# Altium PCB TMS320F28335GF.PcbDoc
Units mil, origin at the board's own origin, x right, y up, seen from the top; angles counter-clockwise.
Board outline 6000 x 4000 mil, 2 copper layers (Top Layer, Bottom Layer); 146 components, 454 nets, 1311 pads, 0 vias.
Unrouted connection lines stored in the file: 803.
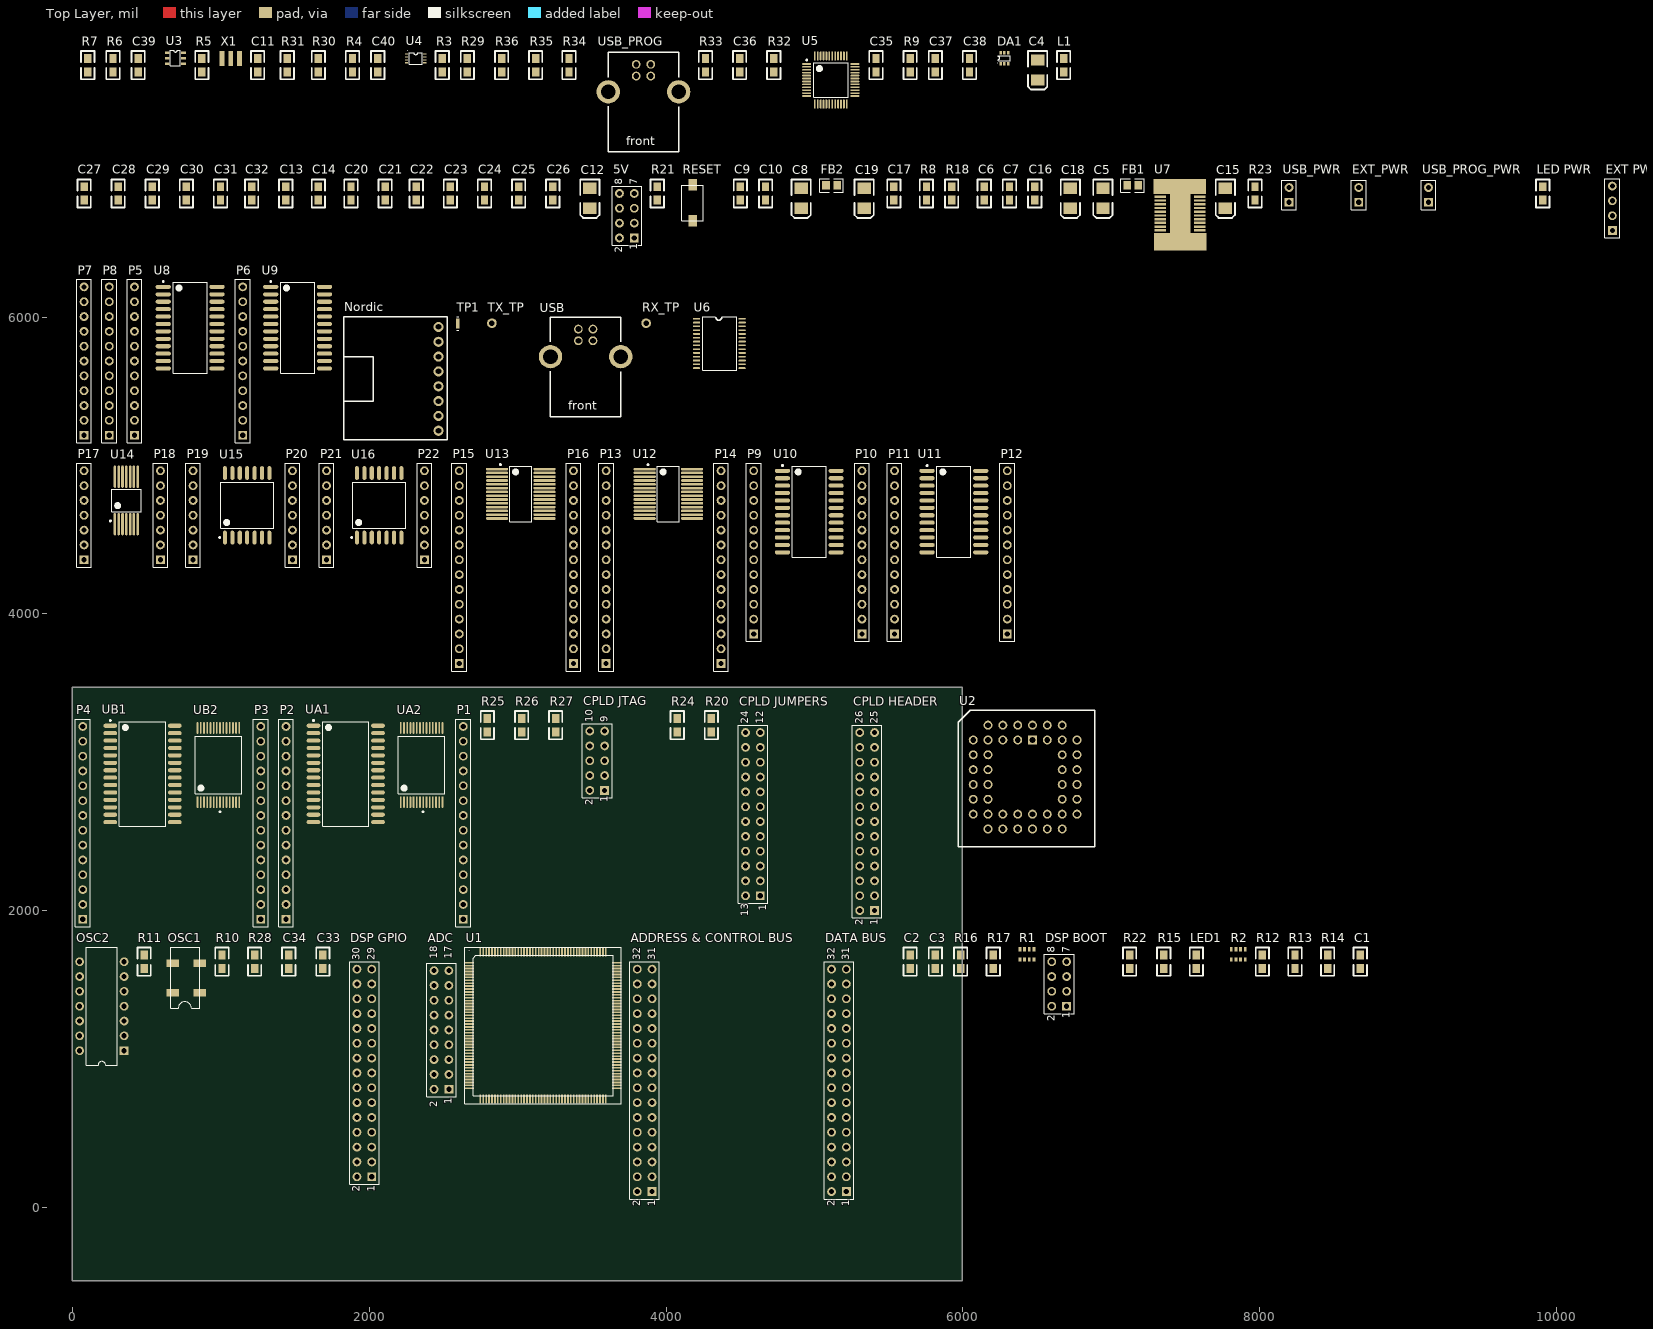
[diagram p0: Top Layer view]
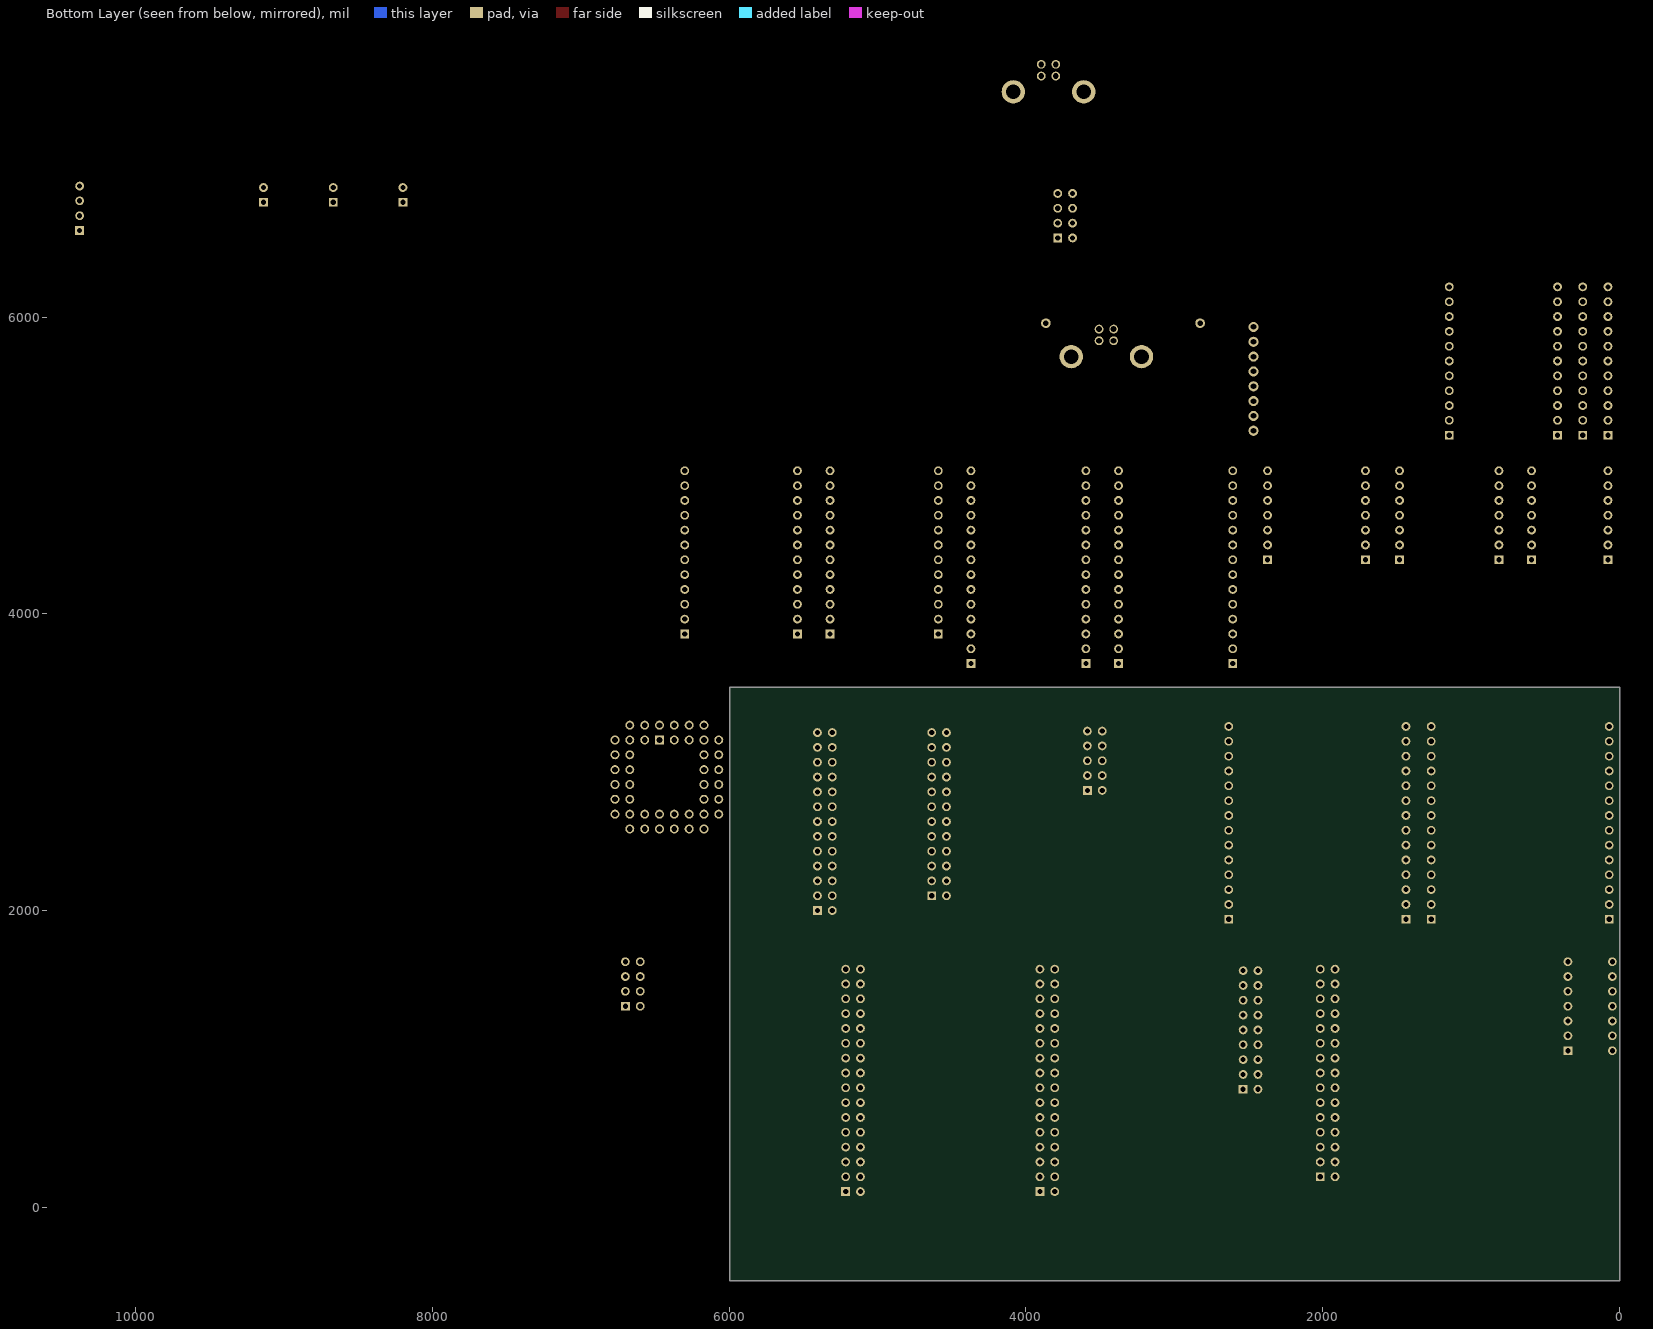
[diagram p1: Bottom Layer view, seen from below]

## Layer stack, top to bottom
Top Solder: solder mask 0.4, Solder Resist, Dk 3.5
Top Layer: signal copper 1.4
Dielectric 1: dielectric 12.6, FR-4, Dk 4.8
Bottom Layer: signal copper 1.4
Bottom Solder: solder mask 0.4, Solder Resist, Dk 3.5

## Board outline
-5,-495 5995,-495 5995,3505 -5,3505

## Design rules (kind name [scope] priority, off if disabled: settings)
Clearance [All] p1: gap=10
PolygonConnect [All] p1: connectstyle=Relief reliefconductorwidth=10 reliefentries=4 polygonreliefangle="90 Angle" airgapwidth=10
RoomDefinition XDS_100_USB_Programmer [InComponentClass('XDS_100_USB_Programmer')] p1: confinementstyle=ConfineIn formatcopy=TRUE lockcomponents=FALSE outline 40,7100 6740,7100 6740,7910 40,7910
RoomDefinition Power [InComponentClass('Power')] p2: confinementstyle=ConfineIn formatcopy=TRUE lockcomponents=FALSE outline 15,6420 10755,6420 10755,7045 15,7045
RoomDefinition F28335_USB_and_Nordic [InComponentClass('F28335_USB_and_Nordic')] p3: confinementstyle=ConfineIn formatcopy=TRUE lockcomponents=FALSE outline 1810,5165 4550,5165 4550,6115 1810,6115
RoomDefinition F28335_Level_Shifters [InComponentClass('F28335_Level_Shifters')] p4: confinementstyle=ConfineIn formatcopy=TRUE lockcomponents=FALSE outline 15,5145 1775,5145 1775,6365 15,6365
RoomDefinition F28335_FanOut [InComponentClass('F28335_FanOut')] p5: confinementstyle=ConfineIn formatcopy=TRUE lockcomponents=FALSE outline 15,3605 6425,3605 6425,5125 15,5125
RoomDefinition F28335_CPLD [InComponentClass('F28335_CPLD')] p6: confinementstyle=ConfineIn formatcopy=TRUE lockcomponents=FALSE outline 2735,1885 6900,1885 6900,3460 2735,3460
RoomDefinition F28335_AddOn_Memory [InComponentClass('F28335_AddOn_Memory')] p7: confinementstyle=ConfineIn formatcopy=TRUE lockcomponents=FALSE outline 7.01,1881.1 2692.01,1881.1 2692.01,3401.1 7.01,3401.1
RoomDefinition C283x_DSP [InComponentClass('C283x_DSP')] p8: confinementstyle=ConfineIn formatcopy=TRUE lockcomponents=FALSE outline 5,-10 8740,-10 8740,1865 5,1865
RoutingVias [All] p1: holewidth=28 width=50 viastyle="Through Hole" minholewidth=28 minwidth=50 maxholewidth=28 maxwidth=50
SolderMaskExpansion [All] p1: expansion=4
Width "Schematic Width Constraint_2" [InNet('5V_USB_PWR')] p1: maxlimit=20 minlimit=10 preferedwidth=20
Width "Schematic Width Constraint_1" [InNet('EXT_PWR')] p2: maxlimit=15 minlimit=15 preferedwidth=15
Width "Schematic Width Constraint" [InNet('+5.0V')] p3: maxlimit=15 minlimit=11 preferedwidth=11
Width [All] p4: maxlimit=10 minlimit=10 preferedwidth=10
30 further rules are at their usual default settings.

## Classes and differential pairs
net class XD[0..15]: XD0 XD1 XD2 XD3 XD4 XD5 XD6 XD7 XD8 XD9 XD10 XD11 XD12 XD13 XD14 XD15
net class XA[0..19]: XA0 XA1 XA2 XA3 XA4 XA5 XA6 XA7 XA8 XA9 XA10 XA11 XA12 XA13 XA14 XA15 XA16 XA17 XA18 XA19
component class XDS_100_USB_Programmer: C4 C11 C35 C36 C37 C38 C39 C40 DA1 L1 R3 R4 R5 R6 R7 R9 R29 R30 R31 R32 R33 R34 R35 R36 U3 U4 U5 USB_PROG X1 "XDS-100 JTAG"
component class Power: 5V C5 C6 C7 C8 C9 C10 C12 C13 C14 C15 C16 C17 C18 C19 C20 C21 C22 C23 C24 C25 C26 C27 C28 C29 C30 C31 C32 "EXT PWR" EXT_PWR FB1 FB2 "LED PWR" R8 R18 R21 R23 RESET U7 USB_PROG_PWR USB_PWR
component class F28335_USB_and_Nordic: Nordic RX_TP TP1 TX_TP U6 USB
component class F28335_Level_Shifters: P5 P6 P7 P8 U8 U9
component class F28335_FanOut: P9 P10 P11 P12 P13 P14 P15 P16 P17 P18 P19 P20 P21 P22 U10 U11 U12 U13 U14 U15 U16
component class F28335_CPLD: "CPLD HEADER" "CPLD JTAG" "CPLD JUMPERS" R20 R24 R25 R26 R27 U2
component class F28335_AddOn_Memory: P1 P2 P3 P4 UA1 UA2 UB1 UB2
component class C283x_DSP: ADC "ADDRESS & CONTROL BUS" C1 C2 C3 C33 C34 "DATA BUS" "DSP BOOT" "DSP GPIO" LED1 OSC1 OSC2 R1 R2 R10 R11 R12 R13 R14 R15 R16 R17 R22 R28 U1

## Components (designator, comment, footprint, x,y, rotation, side; value= is the part's Value field where it differs from the comment)
5V "Header 4X2" HDR2X4 3785,6535 r90 top
ADC "Header 9X2" HDR2X9 2535,795 r90 top
"ADDRESS & CONTROL BUS" "Header 16X2" HDR2X16 3905,105 r90 top
C1 "Cap Semi" 0805 8680,1610 r90 top
C2 "Cap Semi" 0805 5645,1610 r90 top
C3 "Cap Semi" 0805 5815,1610 r90 top
C4 "Pol Cap" 3528 6505,7600 r90 top
C5 "10uF" 3528 6945,6735 r90 top
C6 "Cap Semi" 0805 6145,6790 r90 top
C7 "Cap Semi" 0805 6315,6790 r90 top
C8 "10uF" 3528 4910,6735 r90 top
C9 "Cap Semi" 0805 4500,6790 r90 top
C10 "Cap Semi" 0805 4670,6790 r90 top
C11 "Cap Semi" 0805 1245,7655 r90 top
C12 "10uF" 3528 3485,6735 r90 top
C13 "Cap Semi" 0805 1435,6790 r90 top
C14 "Cap Semi" 0805 1655,6790 r90 top
C15 "10uF" 3528 7770,6735 r90 top
C16 "Cap Semi" 0805 6485,6790 r90 top
C17 "Cap Semi" 0805 5535,6790 r90 top
C18 "10uF" 3528 6725,6735 r90 top
C19 "10uF" 3528 5335,6735 r90 top
C20 "Cap Semi" 0805 1875,6790 r90 top
C21 "Cap Semi" 0805 2105,6790 r90 top
C22 "Cap Semi" 0805 2315,6790 r90 top
C23 "Cap Semi" 0805 2545,6790 r90 top
C24 "Cap Semi" 0805 2775,6790 r90 top
C25 "Cap Semi" 0805 3005,6790 r90 top
C26 "Cap Semi" 0805 3235,6790 r90 top
C27 "Cap Semi" 0805 75,6790 r90 top
C28 "Cap Semi" 0805 305,6790 r90 top
C29 "Cap Semi" 0805 535,6790 r90 top
C30 "Cap Semi" 0805 765,6790 r90 top
C31 "Cap Semi" 0805 995,6790 r90 top
C32 "Cap Semi" 0805 1205,6790 r90 top
C33 "Cap Semi" 0805 1685,1610 r90 top
C34 "Cap Semi" 0805 1455,1610 r90 top
C35 "Cap Semi" 0805 5415,7655 r90 top
C36 "Cap Semi" 0805 4495,7655 r90 top
C37 "Cap Semi" 0805 5815,7655 r90 top
C38 "Cap Semi" 0805 6045,7655 r90 top
C39 "Cap Semi" 0805 440,7655 r90 top
C40 "Cap Semi" 0805 2055,7655 r90 top
"CPLD HEADER" "Header 13X2" HDR2X13 5405,2000 r90 top
"CPLD JTAG" "JTAG" HDR2X5 3585,2810 r90 top
"CPLD JUMPERS" "Header 12X2A" HDR2X12_CEN 4635,2100 r90 top
DA1 "BAW567DW-7" BAW567DW 6255,7710 r0 top
"DATA BUS" "Header 16X2" HDR2X16 5215,105 r90 top
"DSP BOOT" "Header 4X2" HDR2X4 6700,1355 r90 top
"DSP GPIO" "Header 15X2" HDR2X15 2015,205 r90 top
"EXT PWR" "Header 4" HDR1X4 10380,6585 r90 top
EXT_PWR "Header 2" HDR1X2 8670,6775 r90 top
FB1 "Ferrite_Bead" CR2012-0805 7145,6890 r0 top
FB2 "Ferrite_Bead" CR2012-0805 5115,6890 r0 top
L1 "Inductor" 0805 6680,7655 r90 top
LED1 "LED3" 0805 7575,1610 r90 top
"LED PWR" "LED3" 0805 9910,6790 r90 top
Nordic "Nordic MiRF v2" "Nordic MiRF v2" 2465,5235 r90 top
OSC1 "Epson Oscillator" Oscillator 855,1445 r90 top
OSC2 "CLOCK_DIP" DIP-14 195,1355 r90 top
P1 "Header 14" HDR1X14 2632.01,1941.1 r90 top
P2 "Header 14" HDR1X14 1437.01,1941.1 r90 top
P3 "Header 14" HDR1X14 1267.01,1941.1 r90 top
P4 "Header 14" HDR1X14 67.01,1941.1 r90 top
P5 "Header 11" HDR1X11 415,5205 r90 top
P6 "Header 11" HDR1X11 1145,5205 r90 top
P7 "Header 11" HDR1X11 75,5205 r90 top
P8 "Header 11" HDR1X11 245,5205 r90 top
P9 "Header 12" HDR1X12 4590,3865 r90 top
P10 "Header 12" HDR1X12 5320,3865 r90 top
P11 "Header 12" HDR1X12 5540,3865 r90 top
P12 "Header 12" HDR1X12 6300,3865 r90 top
P13 "Header 14" HDR1X14 3595,3665 r90 top
P14 "Header 14" HDR1X14 4370,3665 r90 top
P15 "Header 14" HDR1X14 2605,3665 r90 top
P16 "Header 14" HDR1X14 3375,3665 r90 top
P17 "Header 7" HDR1X7 75,4365 r90 top
P18 "Header 7" HDR1X7 590,4365 r90 top
P19 "Header 7" HDR1X7 810,4365 r90 top
P20 "Header 7" HDR1X7 1480,4365 r90 top
P21 "Header 7" HDR1X7 1710,4365 r90 top
P22 "Header 7" HDR1X7 2370,4365 r90 top
R1 "Res Pack 4" SO-8 6385,1670 r0 top
R2 "Res Pack 4" SO-8 7810,1670 r0 top
R3 "Res" 0805 2490,7655 r90 top
R4 "Res" 0805 1885,7655 r90 top
R5 "Res" 0805 870,7655 r90 top
R6 "Res" 0805 270,7655 r90 top
R7 "Res" 0805 100,7655 r90 top
R8 "Res" 0805 5755,6790 r90 top
R9 "Res" 0805 5645,7655 r90 top
R10 "Res" 0805 1005,1610 r90 top
R11 "Res" 0805 480,1610 r90 top
R12 "Res" 0805 8020,1610 r90 top
R13 "Res" 0805 8240,1610 r90 top
R14 "Res" 0805 8460,1610 r90 top
R15 "Res" 0805 7355,1610 r90 top
R16 "Res" 0805 5985,1610 r90 top
R17 "Res" 0805 6205,1610 r90 top
R18 "Res" 0805 5925,6790 r90 top
R20 "Res" 0805 4305,3205 r90 top
R21 "Res" 0805 3940,6790 r90 top
R22 "Res" 0805 7125,1610 r90 top
R23 "Res" 0805 7970,6790 r90 top
R24 "Res" 0805 4075,3205 r90 top
R25 "Res" 0805 2795,3205 r90 top
R26 "Res" 0805 3025,3205 r90 top
R27 "Res" 0805 3255,3205 r90 top
R28 "Res" 0805 1225,1610 r90 top
R29 "Res" 0805 2660,7655 r90 top
R30 "Res" 0805 1655,7655 r90 top
R31 "Res" 0805 1445,7655 r90 top
R32 "Res" 0805 4725,7655 r90 top
R33 "Res" 0805 4265,7655 r90 top
R34 "Res" 0805 3345,7655 r90 top
R35 "Res" 0805 3120,7655 r90 top
R36 "Res" 0805 2890,7655 r90 top
RESET "SW-PB" SWITCH_2PAD_SMD 4180,6650 r90 top
RX_TP "Testpoint" "TestPoint Trough-Hole" 3865,5960 r90 top
TP1 "Testpoint" TestPoint 2595,5960 r90 top
TX_TP "Testpoint" "TestPoint Trough-Hole" 2825,5960 r90 top
U1 "TMS320F28335GF" QFP176 3170,1225 r0 top
U2 "EPM3064ALC44" PLCC_44 6450,3070 r0 top
U3 "93LC46BT-I/OT" 93LC46BT-I/OT 635,7785 r0 top
U4 "SN74LVC2G74DCU" DCU8 2250,7775 r0 top
U5 "FTDI FT2232D" "FTDI FT2232D" 5110,7600 r0 top
U6 "FT232RL" SSOP28 4205,5990 r0 top
U7 "TPS70351" PWP24 7465,6695 r0 top
U8 "SN74CBTD3384" DW-24 790,5930 r0 top
U9 "SN74CBTD3384" DW-24 1515,5930 r0 top
U10 "SN74CBTD3384" DW-24 4965,4690 r0 top
U11 "SN74CBTD3384" DW-24 5940,4690 r0 top
U12 "SSOP 28 Fanout" "SSOP-28 Fan out" 4015,4810 r0 top
U13 "SSOP 28 Fanout" "SSOP-28 Fan out" 3020,4810 r0 top
U14 "SSOP 14 Fanout" "SSOP-14 Fan out" 360,4765 r90 top
U15 "SOIC 14 Fanout" "SOIC-14 Fan out" 1025,4515 r90 top
U16 "SOIC 14 Fanout" "SOIC-14 Fan out" 1915,4515 r90 top
UA1 "CY62256VNLL" "28-SOIC CY62256VNLL" 1622.01,3246.1 r0 top
UA2 "CY62256VNLL" "28-TSSOP CY62256VNLL" 2362.01,2731.1 r90 top
UB1 "CY62256VNLL" "28-SOIC CY62256VNLL" 252.01,3246.1 r0 top
UB2 "CY62256VNLL" "28-TSSOP CY62256VNLL" 992.01,2731.1 r90 top
USB "DSP UART" USB_TypeB_RightAngle 3220,5735 r0 top
USB_PROG "USB" USB_TypeB_RightAngle 3610,7520 r0 top
USB_PROG_PWR "Header 2" HDR1X2 9140,6775 r90 top
USB_PWR "Header 2" HDR1X2 8200,6775 r90 top
X1 "6MHz Resonator" "6.00Mhz Resonator" 1005,7745 r0 top

## Footprints (in the part's own frame and the unit in brackets; to place one, negate y for a bottom-side part, rotate by r counter-clockwise, add the part's x,y. Pads: shape width x height; smd on the part's side, far side on the other; paste and mask are expansions set on the pad)
"6.00Mhz Resonator" [mm]
  rect 0.8x2.6 smd: 1(0,0) 2(1.5,0) 3(3,0)
"28-SOIC CY62256VNLL" [mm]
  oval 2.35x0.7 smd: 1(0,0) 2(0,-1.27) 3(0,-2.54) 4(0,-3.81) 5(0,-5.08) 6(0,-6.35) 7(0,-7.62) 8(0,-8.89) 9(0,-10.16) 10(0,-11.43) 11(0,-12.7) 12(0,-13.97) 13(0,-15.24) 14(0,-16.51) 15(11.05,-16.51) 16(11.05,-15.24) 17(11.05,-13.97) 18(11.05,-12.7) 19(11.05,-11.43) 20(11.05,-10.16) 21(11.05,-8.89) 22(11.05,-7.62) 23(11.05,-6.35) 24(11.05,-5.08) 25(11.05,-3.81) 26(11.05,-2.54) 27(11.05,-1.27) 28(11.05,0)
  silkscreen extent -0.12,-17.2 9.48,1.02, body extent 1.77,-17.22 9.28,0.71, height 2.59
"28-TSSOP CY62256VNLL" [mm]
  oval 2x0.3 smd: 1(0,0) 2(0,-0.55) 3(0,-1.1) 4(0,-1.65) 5(0,-2.2) 6(0,-2.75) 7(0,-3.3) 8(12.7,-3.3) 9(12.7,-2.75) 10(12.7,-2.2) 11(12.7,-1.65) 12(12.7,-1.1) 13(12.7,-0.55) 14(12.7,0) 15(12.7,0.55) 16(12.7,1.1) 17(12.7,1.65) 18(12.7,2.2) 19(12.7,2.75) 20(12.7,3.3) 21(12.7,3.85) 22(0,3.85) 23(0,3.3) 24(0,2.75) 25(0,2.2) 26(0,1.65) 27(0,1.1) 28(0,0.55)
  silkscreen extent -1.77,-3.73 11.3,4.28, body extent 0.45,-3.72 12.25,4.28, height 1.1
93LC46BT-I/OT [mm]
  rect 0.8x0.43 smd: 1(0,0) 2(0,-0.95) 3(0,-1.9) 4(2.8,-1.9) 5(2.8,-0.95) 6(2.8,0)
  silkscreen extent 0.56,-2.29 2.24,0.41
0805 [mil]
  rect 60x50 smd: 1(0,0) 2(90,0)
  silkscreen extent -50,-45 140,45
3528 [mil]
  rect 75x90 smd: 1(0,0) 2(135,0)
  silkscreen extent -65,-65 195,65
BAW567DW [mm]
  rect 0.42x0.6 smd: 1(0,0) 2(0.65,0) 3(1.3,0) 4(1.3,1.9) 5(0.65,1.9) 6(0,1.9)
  silkscreen extent -0.41,0.51 1.68,1.37
CR2012-0805 [mm]
  rect 1.3x1.5 smd: 1(-0.95,0) 2(0.95,0)
  silkscreen extent -2,-1.15 2,1.15
DCU8 [mm]
  rect 0.55x0.21 smd: 1(0,0) 2(0,-0.5) 3(0,-1) 4(0,-1.5) 5(3.1,-1.5) 6(3.1,-1) 7(3.1,-0.5) 8(3.1,0)
  silkscreen extent 0.46,-1.78 2.64,0.25
DIP-14 [mm]
  rect 1.5x1.5 hole 0.9: 1(-7.62,-3.81)
  round 1.5 hole 0.9: 2(-5.08,-3.81) 3(-2.54,-3.81) 4(0,-3.81) 5(2.54,-3.81) 6(5.08,-3.81) 7(7.62,-3.81) 8(7.62,3.81) 9(5.08,3.81) 10(2.54,3.81) 11(0,3.81) 12(-2.54,3.81) 13(-5.08,3.81) 14(-7.62,3.81)
  silkscreen extent -10.1,-2.65 10.1,2.65
DW-24 [mm]
  oval 2.6x0.7 smd: 1(-4.6,6.985) 2(-4.6,5.715) 3(-4.6,4.445) 4(-4.6,3.175) 5(-4.6,1.905) 6(-4.6,0.635) 7(-4.6,-0.635) 8(-4.6,-1.905) 9(-4.6,-3.175) 10(-4.6,-4.445) 11(-4.6,-5.715) 12(-4.6,-6.985) 13(4.6,-6.985) 14(4.6,-5.715) 15(4.6,-4.445) 16(4.6,-3.175) 17(4.6,-1.905) 18(4.6,-0.635) 19(4.6,0.635) 20(4.6,1.905) 21(4.6,3.175) 22(4.6,4.445) 23(4.6,5.715) 24(4.6,6.985)
  silkscreen extent -4.72,-7.8 2.9,8.01, body extent -3.8,-7.8 3.8,7.8, height 2.65
"FTDI FT2232D" [mm]
  oval 1.55x0.3 smd: 1(-4.125,2.75) 2(-4.125,2.25) 3(-4.125,1.75) 4(-4.125,1.25) 5(-4.125,0.75) 6(-4.125,0.25) 7(-4.125,-0.25) 8(-4.125,-0.75) 9(-4.125,-1.25) 10(-4.125,-1.75) 11(-4.125,-2.25) 12(-4.125,-2.75) 25(4.125,-2.75) 26(4.125,-2.25) 27(4.125,-1.75) 28(4.125,-1.25) 29(4.125,-0.75) 30(4.125,-0.25) 31(4.125,0.25) 32(4.125,0.75) 33(4.125,1.25) 34(4.125,1.75) 35(4.125,2.25) 36(4.125,2.75)
  oval 0.3x1.55 smd: 13(-2.75,-4.125) 14(-2.25,-4.125) 15(-1.75,-4.125) 16(-1.25,-4.125) 17(-0.75,-4.125) 18(-0.25,-4.125) 19(0.25,-4.125) 20(0.75,-4.125) 21(1.25,-4.125) 22(1.75,-4.125) 23(2.25,-4.125) 24(2.75,-4.125) 37(2.75,4.125) 38(2.25,4.125) 39(1.75,4.125) 40(1.25,4.125) 41(0.75,4.125) 42(0.25,4.125) 43(-0.25,4.125) 44(-0.75,4.125) 45(-1.25,4.125) 46(-1.75,4.125) 47(-2.25,4.125) 48(-2.75,4.125)
  silkscreen extent -4.25,-2.95 2.95,3.57, body extent -3.5,-3.5 3.5,3.5, height 1.6
HDR1X2 [mm] "Connector; Header; 2 Position"
  rect 1.5x1.5 hole 0.9: 1(0,0)
  round 1.5 hole 0.9: 2(2.54,0)
  silkscreen extent -1.27,-1.27 3.81,1.27
HDR1X4 [mm] "Connector; Header; 4 Position"
  rect 1.5x1.5 hole 0.9: 1(0,0)
  round 1.5 hole 0.9: 2(2.54,0) 3(5.08,0) 4(7.62,0)
  silkscreen extent -1.27,-1.27 8.89,1.27
HDR1X7 [mm] "Connector; Header; 7 Position"
  rect 1.5x1.5 hole 0.9: 1(0,0)
  round 1.5 hole 0.9: 2(2.54,0) 3(5.08,0) 4(7.62,0) 5(10.16,0) 6(12.7,0) 7(15.24,0)
  silkscreen extent -1.27,-1.27 16.51,1.27
HDR1X11 [mm] "Connector; Header; 11 Position"
  rect 1.5x1.5 hole 0.9: 1(0,0)
  round 1.5 hole 0.9: 2(2.54,0) 3(5.08,0) 4(7.62,0) 5(10.16,0) 6(12.7,0) 7(15.24,0) 8(17.78,0) 9(20.32,0) 10(22.86,0) 11(25.4,0)
  silkscreen extent -1.27,-1.27 26.67,1.27
HDR1X12 [mm] "Connector; Header; 12 Position"
  rect 1.5x1.5 hole 0.9: 1(0,0)
  round 1.5 hole 0.9: 2(2.54,0) 3(5.08,0) 4(7.62,0) 5(10.16,0) 6(12.7,0) 7(15.24,0) 8(17.78,0) 9(20.32,0) 10(22.86,0) 11(25.4,0) 12(27.94,0)
  silkscreen extent -1.27,-1.27 29.21,1.27
HDR1X14 [mm] "Connector; Header; 14 Position"
  rect 1.5x1.5 hole 0.9: 1(0,0)
  round 1.5 hole 0.9: 2(2.54,0) 3(5.08,0) 4(7.62,0) 5(10.16,0) 6(12.7,0) 7(15.24,0) 8(17.78,0) 9(20.32,0) 10(22.86,0) 11(25.4,0) 12(27.94,0) 13(30.48,0) 14(33.02,0)
  silkscreen extent -1.27,-1.27 34.29,1.27
HDR2X4 [mm] "Connector; Header; 4x2 Position"
  rect 1.5x1.5 hole 0.9: 1(0,0)
  round 1.5 hole 0.9: 2(0,2.54) 3(2.54,0) 4(2.54,2.54) 5(5.08,0) 6(5.08,2.54) 7(7.62,0) 8(7.62,2.54)
  silkscreen extent -1.27,-1.27 8.89,3.81
HDR2X5 [mm] "Connector; Header; 5x2 Position"
  rect 1.5x1.5 hole 0.9: 1(0,0)
  round 1.5 hole 0.9: 2(0,2.54) 3(2.54,0) 4(2.54,2.54) 5(5.08,0) 6(5.08,2.54) 7(7.62,0) 8(7.62,2.54) 9(10.16,0) 10(10.16,2.54)
  silkscreen extent -1.27,-1.27 11.43,3.81
HDR2X9 [mm] "Connector; Header; 9x2 Position"
  rect 1.5x1.5 hole 0.9: 1(0,0)
  round 1.5 hole 0.9: 2(0,2.54) 3(2.54,0) 4(2.54,2.54) 5(5.08,0) 6(5.08,2.54) 7(7.62,0) 8(7.62,2.54) 9(10.16,0) 10(10.16,2.54) 11(12.7,0) 12(12.7,2.54) 13(15.24,0) 14(15.24,2.54) 15(17.78,0) 16(17.78,2.54) 17(20.32,0) 18(20.32,2.54)
  silkscreen extent -1.27,-1.27 21.59,3.81
HDR2X12_CEN [mm] "Connector; Header; 12x2 Position"
  rect 1.5x1.5 hole 0.9: 1(0,0)
  round 1.5 hole 0.9: 2(2.54,0) 3(5.08,0) 4(7.62,0) 5(10.16,0) 6(12.7,0) 7(15.24,0) 8(17.78,0) 9(20.32,0) 10(22.86,0) 11(25.4,0) 12(27.94,0) 13(0,2.54) 14(2.54,2.54) 15(5.08,2.54) 16(7.62,2.54) 17(10.16,2.54) 18(12.7,2.54) 19(15.24,2.54) 20(17.78,2.54) 21(20.32,2.54) 22(22.86,2.54) 23(25.4,2.54) 24(27.94,2.54)
  silkscreen extent -1.27,-1.27 29.21,3.81
HDR2X13 [mm] "Connector; Header; 13x2 Position"
  rect 1.5x1.5 hole 0.9: 1(0,0)
  round 1.5 hole 0.9: 2(0,2.54) 3(2.54,0) 4(2.54,2.54) 5(5.08,0) 6(5.08,2.54) 7(7.62,0) 8(7.62,2.54) 9(10.16,0) 10(10.16,2.54) 11(12.7,0) 12(12.7,2.54) 13(15.24,0) 14(15.24,2.54) 15(17.78,0) 16(17.78,2.54) 17(20.32,0) 18(20.32,2.54) 19(22.86,0) 20(22.86,2.54) 21(25.4,0) 22(25.4,2.54) 23(27.94,0) 24(27.94,2.54) 25(30.48,0) 26(30.48,2.54)
  silkscreen extent -1.27,-1.27 31.75,3.81
HDR2X15 [mm] "Connector; Header; 15x2 Position"
  rect 1.5x1.5 hole 0.9: 1(0,0)
  round 1.5 hole 0.9: 2(0,2.54) 3(2.54,0) 4(2.54,2.54) 5(5.08,0) 6(5.08,2.54) 7(7.62,0) 8(7.62,2.54) 9(10.16,0) 10(10.16,2.54) 11(12.7,0) 12(12.7,2.54) 13(15.24,0) 14(15.24,2.54) 15(17.78,0) 16(17.78,2.54) 17(20.32,0) 18(20.32,2.54) 19(22.86,0) 20(22.86,2.54) 21(25.4,0) 22(25.4,2.54) 23(27.94,0) 24(27.94,2.54) 25(30.48,0) 26(30.48,2.54) 27(33.02,0) 28(33.02,2.54) 29(35.56,0) 30(35.56,2.54)
  silkscreen extent -1.27,-1.27 36.83,3.81
HDR2X16 [mm] "Connector; Header; 16x2 Position"
  rect 1.5x1.5 hole 0.9: 1(0,0)
  round 1.5 hole 0.9: 2(0,2.54) 3(2.54,0) 4(2.54,2.54) 5(5.08,0) 6(5.08,2.54) 7(7.62,0) 8(7.62,2.54) 9(10.16,0) 10(10.16,2.54) 11(12.7,0) 12(12.7,2.54) 13(15.24,0) 14(15.24,2.54) 15(17.78,0) 16(17.78,2.54) 17(20.32,0) 18(20.32,2.54) 19(22.86,0) 20(22.86,2.54) 21(25.4,0) 22(25.4,2.54) 23(27.94,0) 24(27.94,2.54) 25(30.48,0) 26(30.48,2.54) 27(33.02,0) 28(33.02,2.54) 29(35.56,0) 30(35.56,2.54) 31(38.1,0) 32(38.1,2.54)
  silkscreen extent -1.27,-1.27 39.37,3.81
"Nordic MiRF v2" [mil]
  round 68 hole 38: 1(0,0) 2(100,0) 3(200,0) 4(300,0) 5(400,0) 6(500,0) 7(600,0) 8(700,0)
  silkscreen extent -60,-60 770,640
Oscillator [mm]
  rect 1.3x2.1 smd: 1(0,0) 2(5.08,0) 3(5.08,4.6) 4(0,4.6)
  silkscreen extent -2.67,0 7.83,5
PLCC_44 [mil]
  rect 60x60 hole 38: 1(20,80)
  round 60 hole 38: 2(-80,180) 3(-80,80) 4(-180,180) 5(-180,80) 6(-280,180) 7(-380,80) 8(-280,80) 9(-380,-20) 10(-280,-20) 11(-380,-120) 12(-280,-120) 13(-380,-220) 14(-280,-220) 15(-380,-320) 16(-280,-320) 17(-380,-420) 18(-280,-520) 19(-280,-420) 20(-180,-520) 21(-180,-420) 22(-80,-520) 23(-80,-420) 24(20,-520) 25(20,-420) 26(120,-520) 27(120,-420) 28(220,-520) 29(320,-420) 30(220,-420) 31(320,-320) 32(220,-320) 33(320,-220) 34(220,-220) 35(320,-120) 36(220,-120) 37(320,-20) 38(220,-20) 39(320,80) 40(220,180) 41(220,80) 42(120,180) 43(120,80) 44(20,180)
  silkscreen extent -480,-640 440,280
PWP24 [mm]
  rect 1.95x0.4 smd: 1(-3.365,3.632) 2(-3.365,2.997) 3(-3.365,2.352) 4(-3.365,1.712) 5(-3.365,1.072) 6(-3.365,0.432) 7(-3.365,-0.208) 8(-3.365,-0.848) 9(-3.365,-1.488) 10(-3.365,-2.128) 11(-3.365,-2.768) 12(-3.365,-3.48) 13(3.366,-3.48) 14(3.358,-2.768) 15(3.358,-2.128) 16(3.358,-1.488) 17(3.358,-0.848) 18(3.358,-0.208) 19(3.358,0.432) 20(3.358,1.072) 21(3.358,1.712) 22(3.358,2.352) 23(3.366,2.997) 24(3.366,3.632)
  rect 9x2.54 smd: 1(-0.064,4.75)
  rect 9x3 smd: 1(0.064,-4.75)
  rect 3.5x7.9 smd: 1(0.064,0.203)
QFP176 [mil]
  rect 63x11.8 smd: 1(-496.1,423.2) 2(-496.1,403.5) 3(-496.1,383.9) 4(-496.1,364.2) 5(-496.1,344.5) 6(-496.1,324.8) 7(-496.1,305.1) 8(-496.1,285.4) 9(-496.1,265.7) 10(-496.1,246.1) 11(-496.1,226.4) 12(-496.1,206.7) 13(-496.1,187) 14(-496.1,167.3) 15(-496.1,147.6) 16(-496.1,128) 17(-496.1,108.3) 18(-496.1,88.6) 19(-496.1,68.9) 20(-496.1,49.2) 21(-496.1,29.5) 22(-496.1,9.8) 23(-496.1,-9.8) 24(-496.1,-29.5) 25(-496.1,-49.2) 26(-496.1,-68.9) 27(-496.1,-88.6) 28(-496.1,-108.3) 29(-496.1,-128) 30(-496.1,-147.6) 31(-496.1,-167.3) 32(-496.1,-187) 33(-496.1,-206.7) 34(-496.1,-226.4) 35(-496.1,-246.1) 36(-496.1,-265.7) 37(-496.1,-285.4) 38(-496.1,-305.1) 39(-496.1,-324.8) 40(-496.1,-344.5) 41(-496.1,-364.2) 42(-496.1,-383.9) 43(-496.1,-403.5) 44(-496.1,-423.2) 89(496.1,-423.2) 90(496.1,-403.5) 91(496.1,-383.9) 92(496.1,-364.2) 93(496.1,-344.5) 94(496.1,-324.8) 95(496.1,-305.1) 96(496.1,-285.4) 97(496.1,-265.7) 98(496.1,-246.1) 99(496.1,-226.4) 100(496.1,-206.7) 101(496.1,-187) 102(496.1,-167.3) 103(496.1,-147.6) 104(496.1,-128) 105(496.1,-108.3) 106(496.1,-88.6) 107(496.1,-68.9) 108(496.1,-49.2) 109(496.1,-29.5) 110(496.1,-9.8) 111(496.1,9.8) 112(496.1,29.5) 113(496.1,49.2) 114(496.1,68.9) 115(496.1,88.6) 116(496.1,108.3) 117(496.1,128) 118(496.1,147.6) 119(496.1,167.3) 120(496.1,187) 121(496.1,206.7) 122(496.1,226.4) 123(496.1,246.1) 124(496.1,265.7) 125(496.1,285.4) 126(496.1,305.1) 127(496.1,324.8) 128(496.1,344.5) 129(496.1,364.2) 130(496.1,383.9) 131(496.1,403.5) 132(496.1,423.2)
  rect 11.8x63 smd: 45(-423.2,-496.1) 46(-403.5,-496.1) 47(-383.9,-496.1) 48(-364.2,-496.1) 49(-344.5,-496.1) 50(-324.8,-496.1) 51(-305.1,-496.1) 52(-285.4,-496.1) 53(-265.7,-496.1) 54(-246.1,-496.1) 55(-226.4,-496.1) 56(-206.7,-496.1) 57(-187,-496.1) 58(-167.3,-496.1) 59(-147.6,-496.1) 60(-128,-496.1) 61(-108.3,-496.1) 62(-88.6,-496.1) 63(-68.9,-496.1) 64(-49.2,-496.1) 65(-29.5,-496.1) 66(-9.8,-496.1) 67(9.8,-496.1) 68(29.5,-496.1) 69(49.2,-496.1) 70(68.9,-496.1) 71(88.6,-496.1) 72(108.3,-496.1) 73(128,-496.1) 74(147.6,-496.1) 75(167.3,-496.1) 76(187,-496.1) 77(206.7,-496.1) 78(226.4,-496.1) 79(246.1,-496.1) 80(265.7,-496.1) 81(285.4,-496.1) 82(305.1,-496.1) 83(324.8,-496.1) 84(344.5,-496.1) 85(364.2,-496.1) 86(383.9,-496.1) 87(403.5,-496.1) 88(423.2,-496.1) 133(423.2,496.1) 134(403.5,496.1) 135(383.9,496.1) 136(364.2,496.1) 137(344.5,496.1) 138(324.8,496.1) 139(305.1,496.1) 140(285.4,496.1) 141(265.7,496.1) 142(246.1,496.1) 143(226.4,496.1) 144(206.7,496.1) 145(187,496.1) 146(167.3,496.1) 147(147.6,496.1) 148(128,496.1) 149(108.3,496.1) 150(88.6,496.1) 151(68.9,496.1) 152(49.2,496.1) 153(29.5,496.1) 154(9.8,496.1) 155(-9.8,496.1) 156(-29.5,496.1) 157(-49.2,496.1) 158(-68.9,496.1) 159(-88.6,496.1) 160(-108.3,496.1) 161(-128,496.1) 162(-147.6,496.1) 163(-167.3,496.1) 164(-187,496.1) 165(-206.7,496.1) 166(-226.4,496.1) 167(-246.1,496.1) 168(-265.7,496.1) 169(-285.4,496.1) 170(-305.1,496.1) 171(-324.8,496.1) 172(-344.5,496.1) 173(-364.2,496.1) 174(-383.9,496.1) 175(-403.5,496.1) 176(-423.2,496.1)
  silkscreen extent -528,-528 528,528
SO-8 [mm]
  rect 0.5x0.75 smd: 1(0,0) 2(0.8,0) 3(1.6,0) 4(2.4,0) 5(2.4,1.75) 6(1.6,1.75) 7(0.8,1.75) 8(0,1.75)
"SOIC-14 Fan out" [mm]
  oval 2.35x0.7 smd: 1(0,0) 2(0,-1.27) 3(0,-2.54) 4(0,-3.81) 5(0,-5.08) 6(0,-6.35) 7(0,-7.62) 8(11.05,-7.62) 9(11.05,-6.35) 10(11.05,-5.08) 11(11.05,-3.81) 12(11.05,-2.54) 13(11.05,-1.27) 14(11.05,0)
  silkscreen extent -0.12,-8.38 9.48,1.02, body extent 1.77,-8.38 9.28,0.71, height 2.59
SSOP28 [mm]
  rect 1.25x0.3 smd: 1(0,0)
  oval 1.25x0.3 smd: 2(0,-0.65) 3(0,-1.3) 4(0,-1.95) 5(0,-2.6) 6(0,-3.25) 7(0,-3.9) 8(0,-4.55) 9(0,-5.2) 10(0,-5.85) 11(0,-6.5) 12(0,-7.15) 13(0,-7.8) 14(0,-8.45) 15(7.8,-8.45) 16(7.8,-7.8) 17(7.8,-7.15) 18(7.8,-6.5) 19(7.8,-5.85) 20(7.8,-5.2) 21(7.8,-4.55) 22(7.8,-3.9) 23(7.8,-3.25) 24(7.8,-2.6) 25(7.8,-1.95) 26(7.8,-1.3) 27(7.8,-0.65) 28(7.8,0)
  silkscreen extent 1.02,-8.78 6.86,0.33
"SSOP-14 Fan out" [mm]
  oval 3.81x0.45 smd: 1(-4.064,1.95) 2(-4.064,1.3) 3(-4.064,0.65) 4(-4.064,0) 5(-4.064,-0.65) 6(-4.064,-1.3) 7(-4.064,-1.95) 8(4.064,-1.95) 9(4.064,-1.3) 10(4.064,-0.65) 11(4.064,0) 12(4.064,0.65) 13(4.064,1.3) 14(4.064,1.95)
  silkscreen extent -3.62,-2.53 1.9,2.85, body extent -2.8,-2.53 2.8,2.47, height 2
"SSOP-28 Fan out" [mm]
  oval 3.81x0.45 smd: 1(-4.064,4.225) 2(-4.064,3.575) 3(-4.064,2.925) 4(-4.064,2.275) 5(-4.064,1.625) 6(-4.064,0.975) 7(-4.064,0.325) 8(-4.064,-0.325) 9(-4.064,-0.975) 10(-4.064,-1.625) 11(-4.064,-2.275) 12(-4.064,-2.925) 13(-4.064,-3.575) 14(-4.064,-4.225) 15(4.064,-4.225) 16(4.064,-3.575) 17(4.064,-2.925) 18(4.064,-2.275) 19(4.064,-1.625) 20(4.064,-0.975) 21(4.064,-0.325) 22(4.064,0.325) 23(4.064,0.975) 24(4.064,1.625) 25(4.064,2.275) 26(4.064,2.925) 27(4.064,3.575) 28(4.064,4.225)
  silkscreen extent -3.62,-4.75 1.9,5.12, body extent -2.8,-4.75 2.8,4.75, height 2
SWITCH_2PAD_SMD [mm]
  rect 2x1.5 smd: 1(0,0) 2(6.2,0)
  silkscreen extent 0,-1.78 6.1,1.92
TestPoint [mil]
  rect 70x25 smd: 1(-2,0)
  silkscreen extent -47,-8 43,8
"TestPoint Trough-Hole" [mil]
  round 65 hole 38: 1(0,0)
USB_TypeB_RightAngle [mm]
  round 1.5 hole 1: 1(7.27,4.71) 2(4.77,4.71) 3(4.77,2.71) 4(7.27,2.71)
  round 4 hole 2.5: 5(0,0) 5(12.04,0)
  silkscreen extent 0,-10.3 12.04,6.75

## Part data
5V "DSP BOOT": "Header, 4-Pin, Dual row"
ADC: "Header, 9-Pin, Dual row"
"ADDRESS & CONTROL BUS" "DATA BUS": "Header, 16-Pin, Dual row"
C1 C2 C3 C6 C7 C9 C10 C11 C13 C14 C16 C17 C20 C21 C22 C23 C24 C25 C26 C27 C28 C29 C30 C31 C32 C33 C34 C35 C36 C37 C38 C39 C40: "Capacitor (Semiconductor SIM Model)"
C4: library part "CAPACITOR POL", "Capacitor Tantalum"
C5 C8 C18: library part "CAPACITOR POL", "digi-399-3096-1-ND"
C12 C19: library part "CAPACITOR POL", "digi-399-1576-1-ND"
C15: library part "CAPACITOR POL", "digi-399-1563-1-ND"
"CPLD HEADER": "Header, 13-Pin, Dual row"
"CPLD JTAG": library part "Header 5X2", "Header, 5-Pin, Dual row"
"CPLD JUMPERS": "Header, 12-Pin, Dual row"
DA1: "QUAD SURFACE MOUNT SWITCHING DIODE ARRAY"
"DSP GPIO": "Header, 15-Pin, Dual row"
"EXT PWR": "Header, 4-Pin"
EXT_PWR USB_PROG_PWR USB_PWR: "Header, 2-Pin"
FB1 FB2: "Ferrite Bead"
LED1 "LED PWR": "Typical BLUE SiC LED"
OSC1: library part Oscillator, "15Mhz Epson Clock"
P1 P2 P3 P4 P13 P14 P15 P16: "Header, 14-Pin"
P5 P6 P7 P8: "Header, 11-Pin"
P9 P10 P11 P12: "Header, 12-Pin"
P17 P18 P19 P20 P21 P22: "Header, 7-Pin"
R1 R2: "4 Isolated Resistor Network"
R3 R4 R5 R6 R7 R8 R9 R10 R11 R12 R13 R14 R15 R16 R17 R18 R20 R21 R22 R23 R24 R25 R26 R27 R28 R29 R30 R31 R32 R33 R34 R35 R36: library part "Res Semi", "Semiconductor Resistor"
RESET: "Switch"
U1: library part TMS320F283XXPGF_23, "Texas Instruments F28335"
U2: "Altera MAX3000A PLCC"
U3: "1K Microwire Compatible Serial EEPROM"
U4: library part LVC2G74, "Single Positive-Edge-Triggered D-Type Flip-Flop with Clear and Preset"
U6: "FTDI FT232RL"
U7: "IC 3.3V/1.8V LDO REG 24-HTSSOP"
U8 U9 U10 U11: "10-Bit FET Bus Switches With Level Shifting"
U15 U16: library part "SSOP 14 Fanout"
UA1 UA2 UB1 UB2: "Cypress SRAM 256KB 3.3V"
USB: library part USB
X1: library part "Resonator Ceramic", "Ceramic Resonator"

## Nets (pads, with @x,y where several pads share a name; then routed paths per layer and width w, separated by ;. In a path a pad name is that pad's centre, name@x,y a point inside that pad or via, vN(x,y) a via of type N, cw(c..) or ccw(c..) an arc to the next point about the centre after c; other vN are vias at no path point)
5V_USB_PROG: USB_PROG.1 USB_PROG_PWR.2
5V_USB_PWR: U6.20 USB.1 USB_PWR.2
+1.8V: C12.1 C13.2 C14.2 C19.1 C20.2 C21.2 C22.2 C23.2 C24.2 C25.2 C26.2 FB1.1 U1.4 U1.15 U1.23 U1.29 U1.61 U1.101 U1.109 U1.117 U1.126 U1.139 U1.146 U1.154 U1.167 U7.14 U7.15 U7.16
+3.3V: "CPLD JTAG.4" C18.1 C27.2 C28.2 C29.2 C30.2 C31.2 C32.2 C37.2 C38.1 C39.2 C40.2 FB2.1 Nordic.1 OSC1.1 OSC1.4 OSC2.14 R2.5 R2.6 R2.7 R2.8 R7.1 R8.2 R12.2 R13.2 R14.2 R16.1 R17.2 R18.2 R23.1 R25.2 R26.2 R27.2 R30.2 R31.2 U1.9 U1.71 U1.84 U1.93 U1.107 U1.121 U1.143 U1.159 U1.170 U2.3 U2.15 U2.23 U2.35 U3.6 U4.2 U4.7 U4.8 U5.14 U5.31 U7.21 U7.22 U7.23
+5.0V: 5V.1 5V.2 5V.3 5V.4 5V.5 5V.6 5V.7 5V.8 C15.1 C16.2 C17.2 DA1.6 EXT_PWR.1 L1.1 U7.2 U7.3 U7.10 U7.11 U8.24 U9.24 USB_PROG_PWR.1 USB_PWR.1
+A1.8V: C5.1 C6.2 C7.2 FB1.2 U1.31 U1.59
+A3.3V: C8.1 C9.2 C10.2 FB2.2 U1.34 U1.45
/RST_SWITCH: RESET.2 U7.6
ADCINA0: ADC.2 U1.42
ADCINA1: ADC.4 U1.41
ADCINA2: ADC.6 U1.40
ADCINA3: ADC.8 U1.39
ADCINA4: ADC.10 U1.38
ADCINA5: ADC.12 U1.37
ADCINA6: ADC.14 U1.36
ADCINA7: ADC.16 U1.35
ADCINB0: ADC.1 U1.46
ADCINB1: ADC.3 U1.47
ADCINB2: ADC.5 U1.48
ADCINB3: ADC.7 U1.49
ADCINB4: ADC.9 U1.50
ADCINB5: ADC.11 U1.51
ADCINB6: ADC.13 U1.52
ADCINB7: ADC.15 U1.53
ADCREFIN: ADC.17 U1.54
ADCREFM: C34.1 U1.55
ADCREFP: C33.1 U1.56
ADCRESEXT: R28.2 U1.57
AGND: ADC.18 C5.2 C6.1 C7.1 C8.2 C9.1 C10.1 C33.2 C34.2 R21.2 R28.1 U1.32 U1.33 U1.43 U1.44 U1.58
CBUS0: U6.23
CBUS1: U6.22
CBUS2: U6.13
CBUS3: U6.14
CBUS4: U6.12
CP_2_DSP_XCLKOUT: "CPLD JUMPERS.14" U2.2
CP_4: "CPLD HEADER.1" "CPLD JUMPERS.15" U2.4
CP_5: "CPLD HEADER.3" "CPLD JUMPERS.16" U2.5
CP_6: "CPLD HEADER.5" "CPLD JUMPERS.17" U2.6
CP_8: "CPLD HEADER.7" "CPLD JUMPERS.18" U2.8
CP_9: "CPLD HEADER.9" "CPLD JUMPERS.19" U2.9
CP_11: "CPLD HEADER.11" "CPLD JUMPERS.20" U2.11
CP_12: "CPLD HEADER.13" "CPLD JUMPERS.21" U2.12
CP_14: "CPLD HEADER.15" "CPLD JUMPERS.22" U2.14
CP_16: "CPLD HEADER.17" "CPLD JUMPERS.23" U2.16
CP_18: "CPLD HEADER.19" "CPLD JUMPERS.24" U2.18
CP_19: "CPLD HEADER.21" U2.19
CP_20: "CPLD HEADER.23" U2.20
CP_21: "CPLD HEADER.25" U2.21
CP_24: "CPLD HEADER.26" U2.24
CP_25: "CPLD HEADER.24" U2.25
CP_26: "CPLD HEADER.22" U2.26
CP_27: "CPLD HEADER.20" U2.27
CP_28: "CPLD HEADER.18" U2.28
CP_29: "CPLD HEADER.16" U2.29
CP_31: "CPLD HEADER.14" U2.31
CP_33: "CPLD HEADER.12" U2.33
CP_34: "CPLD HEADER.10" U2.34
CP_37: "CPLD HEADER.8" U2.37
CP_39: "CPLD HEADER.6" U2.39
CP_40: "CPLD HEADER.4" U2.40
CP_41: "CPLD HEADER.2" U2.41
CP_43_DSP_XCLKIN: "CPLD JUMPERS.13" U2.43
CPLD_TCK: "CPLD JTAG.1" R24.2 U2.32
CPLD_TDI: "CPLD JTAG.9" R25.1 U2.7
CPLD_TDO: "CPLD JTAG.3" R27.1 U2.38
CPLD_TMS: "CPLD JTAG.5" R26.1 U2.13
DSP_UART_RXD: RX_TP.1 U1.67 U6.1
DSP_UART_TXD: TX_TP.1 U1.66 U6.5
EMU0: 
EMU0_DSP: C2.2 R16.2 U1.85
EMU1: 
EMU1_DSP: C3.2 R17.1 U1.86
EXT_PWR: "EXT PWR.1" EXT_PWR.2
GND: "ADDRESS & CONTROL BUS.2" "ADDRESS & CONTROL BUS.4" "ADDRESS & CONTROL BUS.6" "ADDRESS & CONTROL BUS.8" "ADDRESS & CONTROL BUS.10" "CPLD JTAG.2" "CPLD JTAG.10" "DATA BUS.2" "DATA BUS.4" "DATA BUS.6" "DATA BUS.8" "DATA BUS.10" "DATA BUS.12" "DATA BUS.14" "DATA BUS.16" "DATA BUS.18" "DATA BUS.20" "DATA BUS.22" "DATA BUS.24" "DATA BUS.26" "DATA BUS.28" "DATA BUS.30" "DATA BUS.32" "EXT PWR.3" "LED PWR.2" C1.1 C2.1 C3.1 C4.2 C11.2 C12.2 C13.1 C14.1 C15.2 C16.1 C17.1 C18.2 C19.2 C20.1 C21.1 C22.1 C23.1 C24.1 C25.1 C26.1 C27.1 C28.1 C29.1 C30.1 C31.1 C32.1 C35.2 C36.1 C37.1 C38.2 C39.1 C40.1 DA1.3 LED1.2 Nordic.8 OSC1.2 OSC2.4 OSC2.7 R1.1 R1.2 R1.3 R1.4 R15.2 R21.1 R24.1 RESET.1 U1.3 U1.8 U1.14 U1.22 U1.30 U1.60 U1.70 U1.83 U1.92 U1.103 U1.104 U1.106 U1.108 U1.118 U1.120 U1.125 U1.140 U1.144 U1.147 U1.155 U1.160 U1.166 U1.171 U2.10 U2.17 U2.22 U2.30 U2.36 U2.42 U3.2 U4.4 U5.9 U5.10 U5.18 U5.25 U5.26 U5.34 U5.45 U5.47 U6.7 U6.18 U6.21 U6.25 U6.26 U7.1 U7.7 U7.9 U7.12 U7.13 U7.24 U8.12 U9.12 USB.4 USB.5 USB_PROG.4 USB_PROG.5 X1.2
GP16_DSP_SPI_SIMO: "DSP GPIO.4" Nordic.5 U1.27
GP17_DSP_SPI_SOMI: "DSP GPIO.6" Nordic.6 U1.28
GP18_DSP_SPI_CLK: "DSP GPIO.8" Nordic.4 U1.62
GP20_NORDIC_CSN: "DSP GPIO.12" Nordic.3 U1.64
GP21_NORDIC_CE: "DSP GPIO.14" Nordic.2 U1.65
GP24_NORDIC_IRQ: "DSP GPIO.16" Nordic.7 U1.68
GPIO0: "DSP GPIO.1" R22.1 U1.5
GPIO1: "DSP GPIO.3" U1.6
GPIO2: "DSP GPIO.5" U1.7
GPIO3: "DSP GPIO.7" U1.10
GPIO4: "DSP GPIO.9" U1.11
GPIO5: "DSP GPIO.11" U1.12
GPIO6: "DSP GPIO.13" U1.13
GPIO7: "DSP GPIO.15" U1.16
GPIO8: "DSP GPIO.17" U1.17
GPIO9: "DSP GPIO.19" U1.18
GPIO10: "DSP GPIO.21" U1.19
GPIO11: "DSP GPIO.23" U1.20
GPIO12: "DSP GPIO.25" U1.21
GPIO13: "DSP GPIO.27" U1.24
GPIO14: "DSP GPIO.29" U1.25
GPIO15: "DSP GPIO.2" U1.26
GPIO19: "DSP GPIO.10" U1.63
GPIO25: "DSP GPIO.18" U1.69
GPIO26: "DSP GPIO.20" U1.72
GPIO27: "DSP GPIO.22" U1.73
GPIO32: "DSP GPIO.24" U1.74
GPIO33: "DSP GPIO.26" U1.75
GPIO48: "DSP GPIO.28" U1.88
GPIO49: "DSP GPIO.30" U1.89
GPIO50: U1.90
GPIO51: U1.91
GPIO52: U1.94
GPIO53: U1.95
GPIO54: U1.96
GPIO55: U1.97
GPIO56: U1.98
GPIO57: U1.99
GPIO58: U1.100
GPIO59: U1.110
GPIO60: U1.111
GPIO61: U1.112
GPIO62: U1.113
GPIO63: U1.114
NetC4_1: C4.1 L1.2 R9.2 U5.3 U5.42
NetC11_1: C11.1 R31.1 U4.6
NetC35_1: C35.1 R9.1 U5.46
NetC36_2: C36.2 U5.6
NetDA1_1: DA1.1 DA1.5 R3.1 USB_PROG.3
NetDA1_2: DA1.2 DA1.4 R29.1 USB_PROG.2
"NetDSP BOOT_1": "DSP BOOT.1" R1.8
"NetDSP BOOT_3": "DSP BOOT.3" R1.7
"NetDSP BOOT_5": "DSP BOOT.5" R1.6
"NetDSP BOOT_7": "DSP BOOT.7" R1.5
NetLED1_1: LED1.1 R22.2
"NetLED PWR_1": "LED PWR.1" R23.2
NetOSC1_3: OSC1.3 OSC2.8 OSC2.11 R11.1
NetP5_1: P5.1 U8.11
NetP5_2: P5.2 U8.10
NetP5_3: P5.3 U8.9
NetP5_4: P5.4 U8.8
NetP5_5: P5.5 U8.7
NetP5_6: P5.6 U8.6
NetP5_7: P5.7 U8.5
NetP5_8: P5.8 U8.4
NetP5_9: P5.9 U8.3
NetP5_10: P5.10 U8.2
NetP5_11: P5.11 U8.1
NetP6_1: P6.1 U9.11
NetP6_2: P6.2 U9.10
NetP6_3: P6.3 U9.9
NetP6_4: P6.4 U9.8
NetP6_5: P6.5 U9.7
NetP6_6: P6.6 U9.6
NetP6_7: P6.7 U9.5
NetP6_8: P6.8 U9.4
NetP6_9: P6.9 U9.3
NetP6_10: P6.10 U9.2
NetP6_11: P6.11 U9.1
NetP7_1: P7.1 U8.23
NetP7_2: P7.2 U8.22
NetP7_3: P7.3 U8.21
NetP7_4: P7.4 U8.20
NetP7_5: P7.5 U8.19
NetP7_6: P7.6 U8.18
NetP7_7: P7.7 U8.17
NetP7_8: P7.8 U8.16
NetP7_9: P7.9 U8.15
NetP7_10: P7.10 U8.14
NetP7_11: P7.11 U8.13
NetP8_1: P8.1 U9.23
NetP8_2: P8.2 U9.22
NetP8_3: P8.3 U9.21
NetP8_4: P8.4 U9.20
NetP8_5: P8.5 U9.19
NetP8_6: P8.6 U9.18
NetP8_7: P8.7 U9.17
NetP8_8: P8.8 U9.16
NetP8_9: P8.9 U9.15
NetP8_10: P8.10 U9.14
NetP8_11: P8.11 U9.13
NetP9_1: P9.1 U10.12
NetP9_2: P9.2 U10.11
NetP9_3: P9.3 U10.10
NetP9_4: P9.4 U10.9
NetP9_5: P9.5 U10.8
NetP9_6: P9.6 U10.7
NetP9_7: P9.7 U10.6
NetP9_8: P9.8 U10.5
NetP9_9: P9.9 U10.4
NetP9_10: P9.10 U10.3
NetP9_11: P9.11 U10.2
NetP9_12: P9.12 U10.1
NetP10_1: P10.1 U10.24
NetP10_2: P10.2 U10.23
NetP10_3: P10.3 U10.22
NetP10_4: P10.4 U10.21
NetP10_5: P10.5 U10.20
NetP10_6: P10.6 U10.19
NetP10_7: P10.7 U10.18
NetP10_8: P10.8 U10.17
NetP10_9: P10.9 U10.16
NetP10_10: P10.10 U10.15
NetP10_11: P10.11 U10.14
NetP10_12: P10.12 U10.13
NetP11_1: P11.1 U11.12
NetP11_2: P11.2 U11.11
NetP11_3: P11.3 U11.10
NetP11_4: P11.4 U11.9
NetP11_5: P11.5 U11.8
NetP11_6: P11.6 U11.7
NetP11_7: P11.7 U11.6
NetP11_8: P11.8 U11.5
NetP11_9: P11.9 U11.4
NetP11_10: P11.10 U11.3
NetP11_11: P11.11 U11.2
NetP11_12: P11.12 U11.1
NetP12_1: P12.1 U11.24
NetP12_2: P12.2 U11.23
NetP12_3: P12.3 U11.22
NetP12_4: P12.4 U11.21
NetP12_5: P12.5 U11.20
NetP12_6: P12.6 U11.19
NetP12_7: P12.7 U11.18
NetP12_8: P12.8 U11.17
NetP12_9: P12.9 U11.16
NetP12_10: P12.10 U11.15
NetP12_11: P12.11 U11.14
NetP12_12: P12.12 U11.13
NetP13_1: P13.1 U12.14
NetP13_2: P13.2 U12.13
NetP13_3: P13.3 U12.12
NetP13_4: P13.4 U12.11
NetP13_5: P13.5 U12.10
NetP13_6: P13.6 U12.9
NetP13_7: P13.7 U12.8
NetP13_8: P13.8 U12.7
NetP13_9: P13.9 U12.6
NetP13_10: P13.10 U12.5
NetP13_11: P13.11 U12.4
NetP13_12: P13.12 U12.3
NetP13_13: P13.13 U12.2
NetP13_14: P13.14 U12.1
NetP14_1: P14.1 U12.28
NetP14_2: P14.2 U12.27
NetP14_3: P14.3 U12.26
NetP14_4: P14.4 U12.25
NetP14_5: P14.5 U12.24
NetP14_6: P14.6 U12.23
NetP14_7: P14.7 U12.22
NetP14_8: P14.8 U12.21
NetP14_9: P14.9 U12.20
NetP14_10: P14.10 U12.19
NetP14_11: P14.11 U12.18
NetP14_12: P14.12 U12.17
NetP14_13: P14.13 U12.16
NetP14_14: P14.14 U12.15
NetP15_1: P15.1 U13.14
NetP15_2: P15.2 U13.13
NetP15_3: P15.3 U13.12
NetP15_4: P15.4 U13.11
NetP15_5: P15.5 U13.10
NetP15_6: P15.6 U13.9
NetP15_7: P15.7 U13.8
NetP15_8: P15.8 U13.7
NetP15_9: P15.9 U13.6
NetP15_10: P15.10 U13.5
NetP15_11: P15.11 U13.4
NetP15_12: P15.12 U13.3
NetP15_13: P15.13 U13.2
NetP15_14: P15.14 U13.1
NetP16_1: P16.1 U13.28
NetP16_2: P16.2 U13.27
NetP16_3: P16.3 U13.26
NetP16_4: P16.4 U13.25
NetP16_5: P16.5 U13.24
NetP16_6: P16.6 U13.23
NetP16_7: P16.7 U13.22
NetP16_8: P16.8 U13.21
NetP16_9: P16.9 U13.20
NetP16_10: P16.10 U13.19
NetP16_11: P16.11 U13.18
NetP16_12: P16.12 U13.17
NetP16_13: P16.13 U13.16
NetP16_14: P16.14 U13.15
NetP17_1: P17.1 U14.7
NetP17_2: P17.2 U14.6
NetP17_3: P17.3 U14.5
NetP17_4: P17.4 U14.4
NetP17_5: P17.5 U14.3
NetP17_6: P17.6 U14.2
NetP17_7: P17.7 U14.1
NetP18_1: P18.1 U14.14
NetP18_2: P18.2 U14.13
NetP18_3: P18.3 U14.12
NetP18_4: P18.4 U14.11
NetP18_5: P18.5 U14.10
NetP18_6: P18.6 U14.9
NetP18_7: P18.7 U14.8
NetP19_1: P19.1 U15.7
NetP19_2: P19.2 U15.6
NetP19_3: P19.3 U15.5
NetP19_4: P19.4 U15.4
NetP19_5: P19.5 U15.3
NetP19_6: P19.6 U15.2
NetP19_7: P19.7 U15.1
NetP20_1: P20.1 U15.14
NetP20_2: P20.2 U15.13
NetP20_3: P20.3 U15.12
NetP20_4: P20.4 U15.11
NetP20_5: P20.5 U15.10
NetP20_6: P20.6 U15.9
NetP20_7: P20.7 U15.8
NetP21_1: P21.1 U16.7
NetP21_2: P21.2 U16.6
NetP21_3: P21.3 U16.5
NetP21_4: P21.4 U16.4
NetP21_5: P21.5 U16.3
NetP21_6: P21.6 U16.2
NetP21_7: P21.7 U16.1
NetP22_1: P22.1 U16.14
NetP22_2: P22.2 U16.13
NetP22_3: P22.3 U16.12
NetP22_4: P22.4 U16.11
NetP22_5: P22.5 U16.10
NetP22_6: P22.6 U16.9
NetP22_7: P22.7 U16.8
NetR3_2: R3.2 R4.1 U5.7
NetR4_2: R4.2 U5.5
NetR5_1: R5.1 U5.44 X1.3
NetR5_2: R5.2 U5.43 X1.1
NetR6_1: R6.1 U3.3 U5.2
NetR6_2: R6.2 R7.2 U3.1
NetR10_1: R10.1 U1.138
NetR20_2: R20.2 U2.44
NetR29_2: R29.2 U5.8
NetR30_1: R30.1 U5.4
NetTP1_1: TP1.1 U6.28
NetU3_4: U3.4 U5.1
NetU3_5: U3.5 U5.48
NetU4_1: U4.1 U5.11
NetU6_4: U6.4 U6.17
OE: U4.5 U5.12
PG1: R18.1 U7.19
RX-MASTER: U5.39
TCK: R32.1 U5.24
TCK_DSP: R12.1 R32.2 U1.87
TDI: R33.1 U5.23
TDI_DSP: R13.1 R33.2 U1.76
TDO: R34.1 U5.22
TDO_DSP: R34.2 U1.77
TMS: R35.1 U5.21
TMS_DSP: R14.1 R35.2 U1.79
TRSTN: R36.1 U5.20
TRSTN_DSP: C1.2 R15.1 R36.2 U1.78
TX-MASTER: U5.40
UA_1: P1.1 UA1.1 UA2.1
UA_2: P1.2 UA1.2 UA2.2
UA_3: P1.3 UA1.3 UA2.3
UA_4: P1.4 UA1.4 UA2.4
UA_5: P1.5 UA1.5 UA2.5
UA_6: P1.6 UA1.6 UA2.6
UA_7: P1.7 UA1.7 UA2.7
UA_8: P1.8 UA1.8 UA2.8
UA_9: P1.9 UA1.9 UA2.9
UA_10: P1.10 UA1.10 UA2.10
UA_11: P1.11 UA1.11 UA2.11
UA_12: P1.12 UA1.12 UA2.12
UA_13: P1.13 UA1.13 UA2.13
UA_14: P1.14 UA1.14 UA2.14
UA_15: P2.1 UA1.15 UA2.15
UA_16: P2.2 UA1.16 UA2.16
UA_17: P2.3 UA1.17 UA2.17
UA_18: P2.4 UA1.18 UA2.18
UA_19: P2.5 UA1.19 UA2.19
UA_20: P2.6 UA1.20 UA2.20
UA_21: P2.7 UA1.21 UA2.21
UA_22: P2.8 UA1.22 UA2.22
UA_23: P2.9 UA1.23 UA2.23
UA_24: P2.10 UA1.24 UA2.24
UA_25: P2.11 UA1.25 UA2.25
UA_26: P2.12 UA1.26 UA2.26
UA_27: P2.13 UA1.27 UA2.27
UA_28: P2.14 UA1.28 UA2.28
UB_1: P3.1 UB1.1 UB2.1
UB_2: P3.2 UB1.2 UB2.2
UB_3: P3.3 UB1.3 UB2.3
UB_4: P3.4 UB1.4 UB2.4
UB_5: P3.5 UB1.5 UB2.5
UB_6: P3.6 UB1.6 UB2.6
UB_7: P3.7 UB1.7 UB2.7
UB_8: P3.8 UB1.8 UB2.8
UB_9: P3.9 UB1.9 UB2.9
UB_10: P3.10 UB1.10 UB2.10
UB_11: P3.11 UB1.11 UB2.11
UB_12: P3.12 UB1.12 UB2.12
UB_13: P3.13 UB1.13 UB2.13
UB_14: P3.14 UB1.14 UB2.14
UB_15: P4.1 UB1.15 UB2.15
UB_16: P4.2 UB1.16 UB2.16
UB_17: P4.3 UB1.17 UB2.17
UB_18: P4.4 UB1.18 UB2.18
UB_19: P4.5 UB1.19 UB2.19
UB_20: P4.6 UB1.20 UB2.20
UB_21: P4.7 UB1.21 UB2.21
UB_22: P4.8 UB1.22 UB2.22
UB_23: P4.9 UB1.23 UB2.23
UB_24: P4.10 UB1.24 UB2.24
UB_25: P4.11 UB1.25 UB2.25
UB_26: P4.12 UB1.26 UB2.26
UB_27: P4.13 UB1.27 UB2.27
UB_28: P4.14 UB1.28 UB2.28
"USB D+": U6.15 USB.3
"USB D-": U6.16 USB.2
XA0: "ADDRESS & CONTROL BUS.1" U1.151
XA1: "ADDRESS & CONTROL BUS.3" U1.152
XA2: "ADDRESS & CONTROL BUS.5" U1.153
XA3: "ADDRESS & CONTROL BUS.7" U1.156
XA4: "ADDRESS & CONTROL BUS.9" U1.157
XA5: "ADDRESS & CONTROL BUS.11" U1.158
XA6: "ADDRESS & CONTROL BUS.13" U1.161
XA7: "ADDRESS & CONTROL BUS.15" U1.162
XA8: "ADDRESS & CONTROL BUS.17" U1.163
XA9: "ADDRESS & CONTROL BUS.19" U1.164
XA10: "ADDRESS & CONTROL BUS.21" U1.165
XA11: "ADDRESS & CONTROL BUS.23" U1.168
XA12: "ADDRESS & CONTROL BUS.25" "DSP BOOT.2" R2.1 U1.169
XA13: "ADDRESS & CONTROL BUS.27" "DSP BOOT.4" R2.2 U1.172
XA14: "ADDRESS & CONTROL BUS.29" "DSP BOOT.6" R2.3 U1.173
XA15: "ADDRESS & CONTROL BUS.31" "DSP BOOT.8" R2.4 U1.174
XA16: "ADDRESS & CONTROL BUS.32" U1.175
XA17: "ADDRESS & CONTROL BUS.30" "CPLD JUMPERS.10" U1.176
XA18: "ADDRESS & CONTROL BUS.28" "CPLD JUMPERS.11" U1.1
XA19: "ADDRESS & CONTROL BUS.26" "CPLD JUMPERS.12" U1.2
XCLKIN: "CPLD JUMPERS.1" R11.2 U1.105
XCLKOUT: "CPLD JUMPERS.2" R10.2
XD0: "DATA BUS.1" U1.136
XD1: "DATA BUS.3" U1.135
XD2: "DATA BUS.5" U1.134
XD3: "DATA BUS.7" U1.133
XD4: "DATA BUS.9" U1.132
XD5: "DATA BUS.11" U1.131
XD6: "DATA BUS.13" U1.130
XD7: "DATA BUS.15" U1.129
XD8: "DATA BUS.17" U1.128
XD9: "DATA BUS.19" U1.127
XD10: "DATA BUS.21" U1.124
XD11: "DATA BUS.23" U1.123
XD12: "DATA BUS.25" U1.122
XD13: "DATA BUS.27" U1.119
XD14: "DATA BUS.29" U1.116
XD15: "DATA BUS.31" U1.115
XRDN: "ADDRESS & CONTROL BUS.18" "CPLD JUMPERS.6" U1.149
XREADY: "ADDRESS & CONTROL BUS.12" "CPLD JUMPERS.3" U1.142
XRSN: R8.1 U1.80 U2.1 U7.18
XRWN: "ADDRESS & CONTROL BUS.14" "CPLD JUMPERS.4" U1.148
XWEN: "ADDRESS & CONTROL BUS.16" "CPLD JUMPERS.5" U1.137
XZCS0N: "ADDRESS & CONTROL BUS.24" "CPLD JUMPERS.9" U1.145
XZCS6N: "ADDRESS & CONTROL BUS.22" "CPLD JUMPERS.8" U1.141
XZCS7N: "ADDRESS & CONTROL BUS.20" "CPLD JUMPERS.7" U1.150
pads on no net: "CPLD JTAG.6" "CPLD JTAG.7" "CPLD JTAG.8" "EXT PWR.2" "EXT PWR.4" OSC2.1 OSC2.2 OSC2.3 OSC2.5 OSC2.6 OSC2.9 OSC2.10 OSC2.12 OSC2.13 R20.1 U1.81 U1.82 U1.102 U4.3 U5.13 U5.15 U5.16 U5.17 U5.19 U5.27 U5.28 U5.29 U5.30 U5.32 U5.33 U5.35 U5.36 U5.37 U5.38 U5.41 U6.2 U6.3 U6.6 U6.8 U6.9 U6.10 U6.11 U6.19 U6.24 U6.27 U7.4 U7.5 U7.8 U7.17 U7.20

## Text inside footprints (layer, text, board x,y; h text height)
5V: Top Overlay "2" at 3705,6435 h50 r90; Top Overlay "1" at 3805,6455 h50 r90; Top Overlay "7" at 3805,6895 h50 r90; Top Overlay "8" at 3705,6895 h50 r90
ADC: Top Overlay "18" at 2455,1675 h50 r90; Top Overlay "17" at 2555,1675 h50 r90; Top Overlay "1" at 2555,695 h50 r90; Top Overlay "2" at 2455,675 h50 r90
"ADDRESS & CONTROL BUS": Top Overlay "2" at 3825,5 h50 r90; Top Overlay "1" at 3925,5 h50 r90; Top Overlay "31" at 3925,1665 h50 r90; Top Overlay "32" at 3825,1665 h50 r90
"CPLD HEADER": Top Overlay "2" at 5325,1900 h50 r90; Top Overlay "1" at 5425,1900 h50 r90; Top Overlay "25" at 5425,3260 h50 r90; Top Overlay "26" at 5325,3260 h50 r90
"CPLD JTAG": Top Overlay "10" at 3505,3270 h50 r90; Top Overlay "9" at 3605,3270 h50 r90; Top Overlay "1" at 3605,2730 h50 r90; Top Overlay "2" at 3505,2710 h50 r90
"CPLD JUMPERS": Top Overlay "1" at 4675,2000 h50 r90; Top Overlay "13" at 4555,1960 h50 r90; Top Overlay "12" at 4655,3260 h50 r90; Top Overlay "24" at 4555,3260 h50 r90
"DATA BUS": Top Overlay "2" at 5135,5 h50 r90; Top Overlay "1" at 5235,5 h50 r90; Top Overlay "31" at 5235,1665 h50 r90; Top Overlay "32" at 5135,1665 h50 r90
"DSP BOOT": Top Overlay "2" at 6620,1255 h50 r90; Top Overlay "1" at 6720,1275 h50 r90; Top Overlay "7" at 6720,1715 h50 r90; Top Overlay "8" at 6620,1715 h50 r90
"DSP GPIO": Top Overlay "1" at 2035,105 h50 r90; Top Overlay "2" at 1935,105 h50 r90; Top Overlay "29" at 2035,1665 h50 r90; Top Overlay "30" at 1935,1665 h50 r90
USB: Top Overlay "front" at 3340,5375 h60
USB_PROG: Top Overlay "front" at 3730,7160 h60